# Altium PCB PCB6.PcbDoc
Units mil, origin at the board's own origin, x right, y up, seen from the top; angles counter-clockwise.
Board outline 1980.76 x 1398.48 mil, 2 copper layers (Top Layer, Bottom Layer); 39 components, 19 nets, 73 pads, 17 vias.
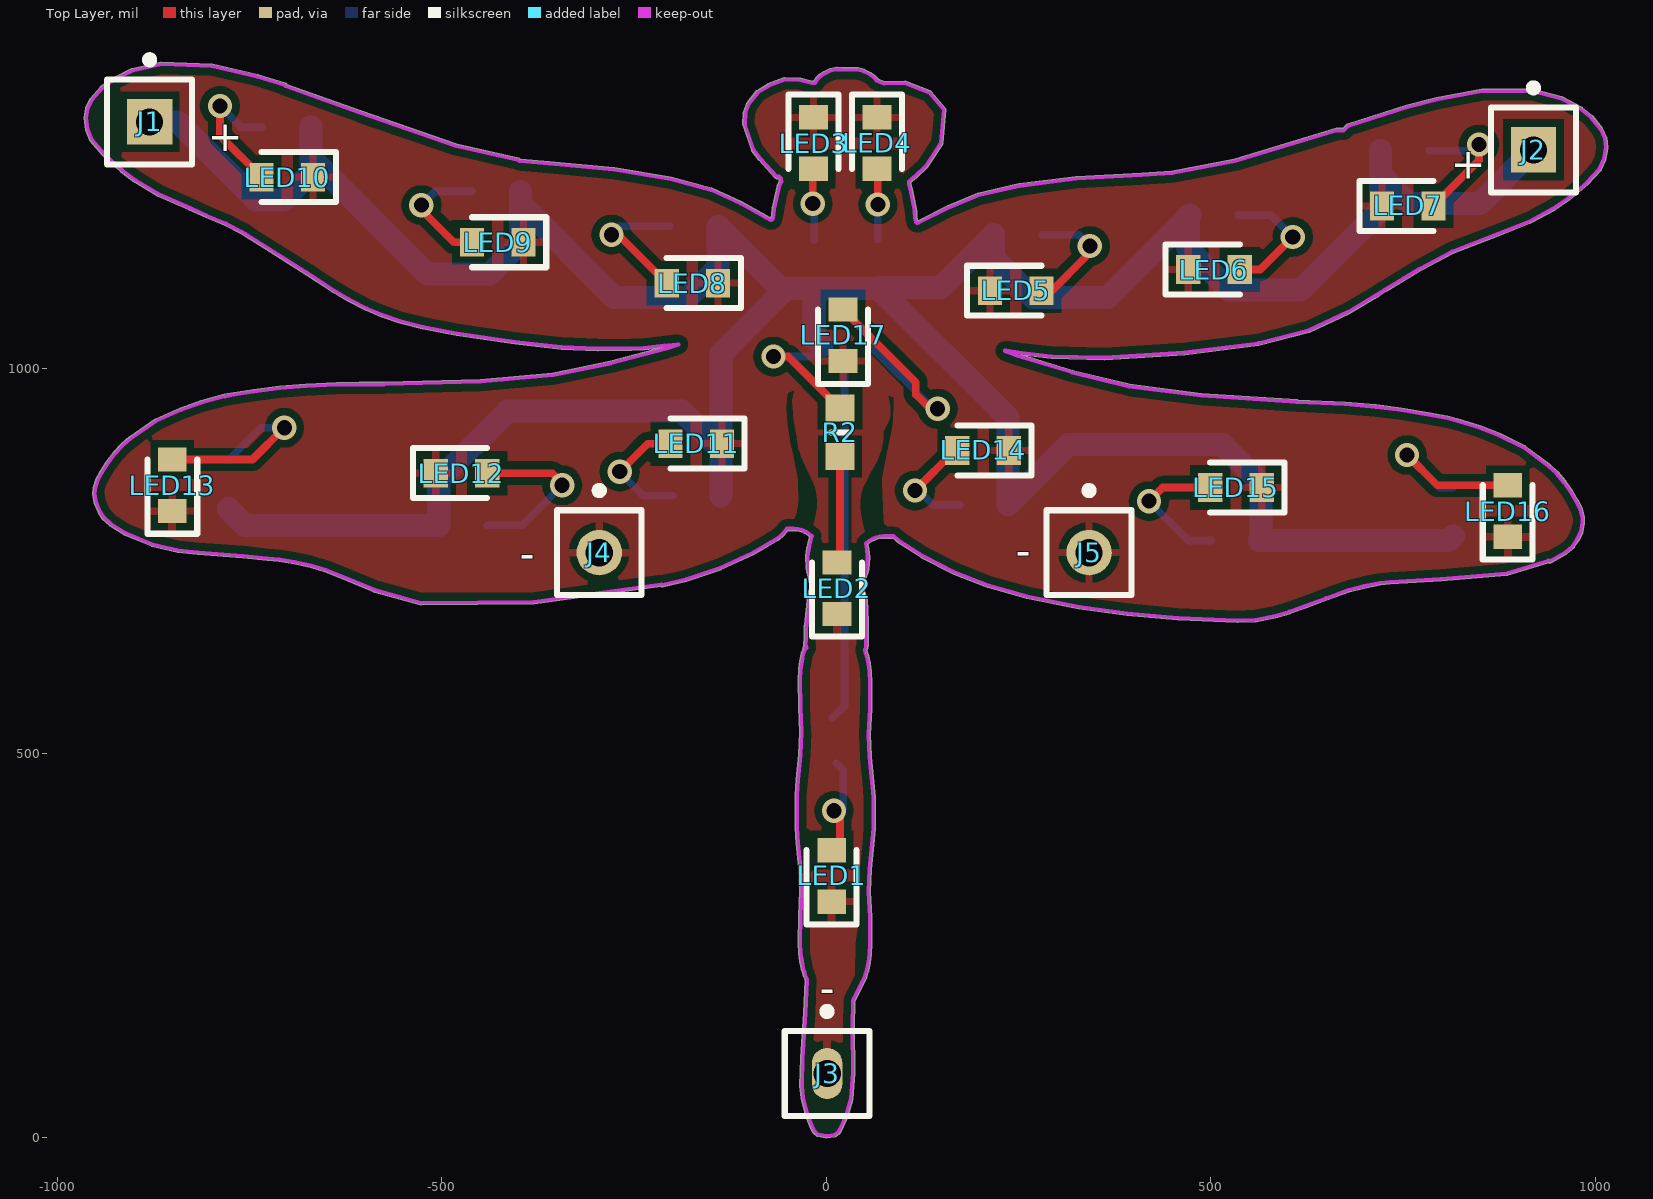
[diagram p0: Top Layer view]
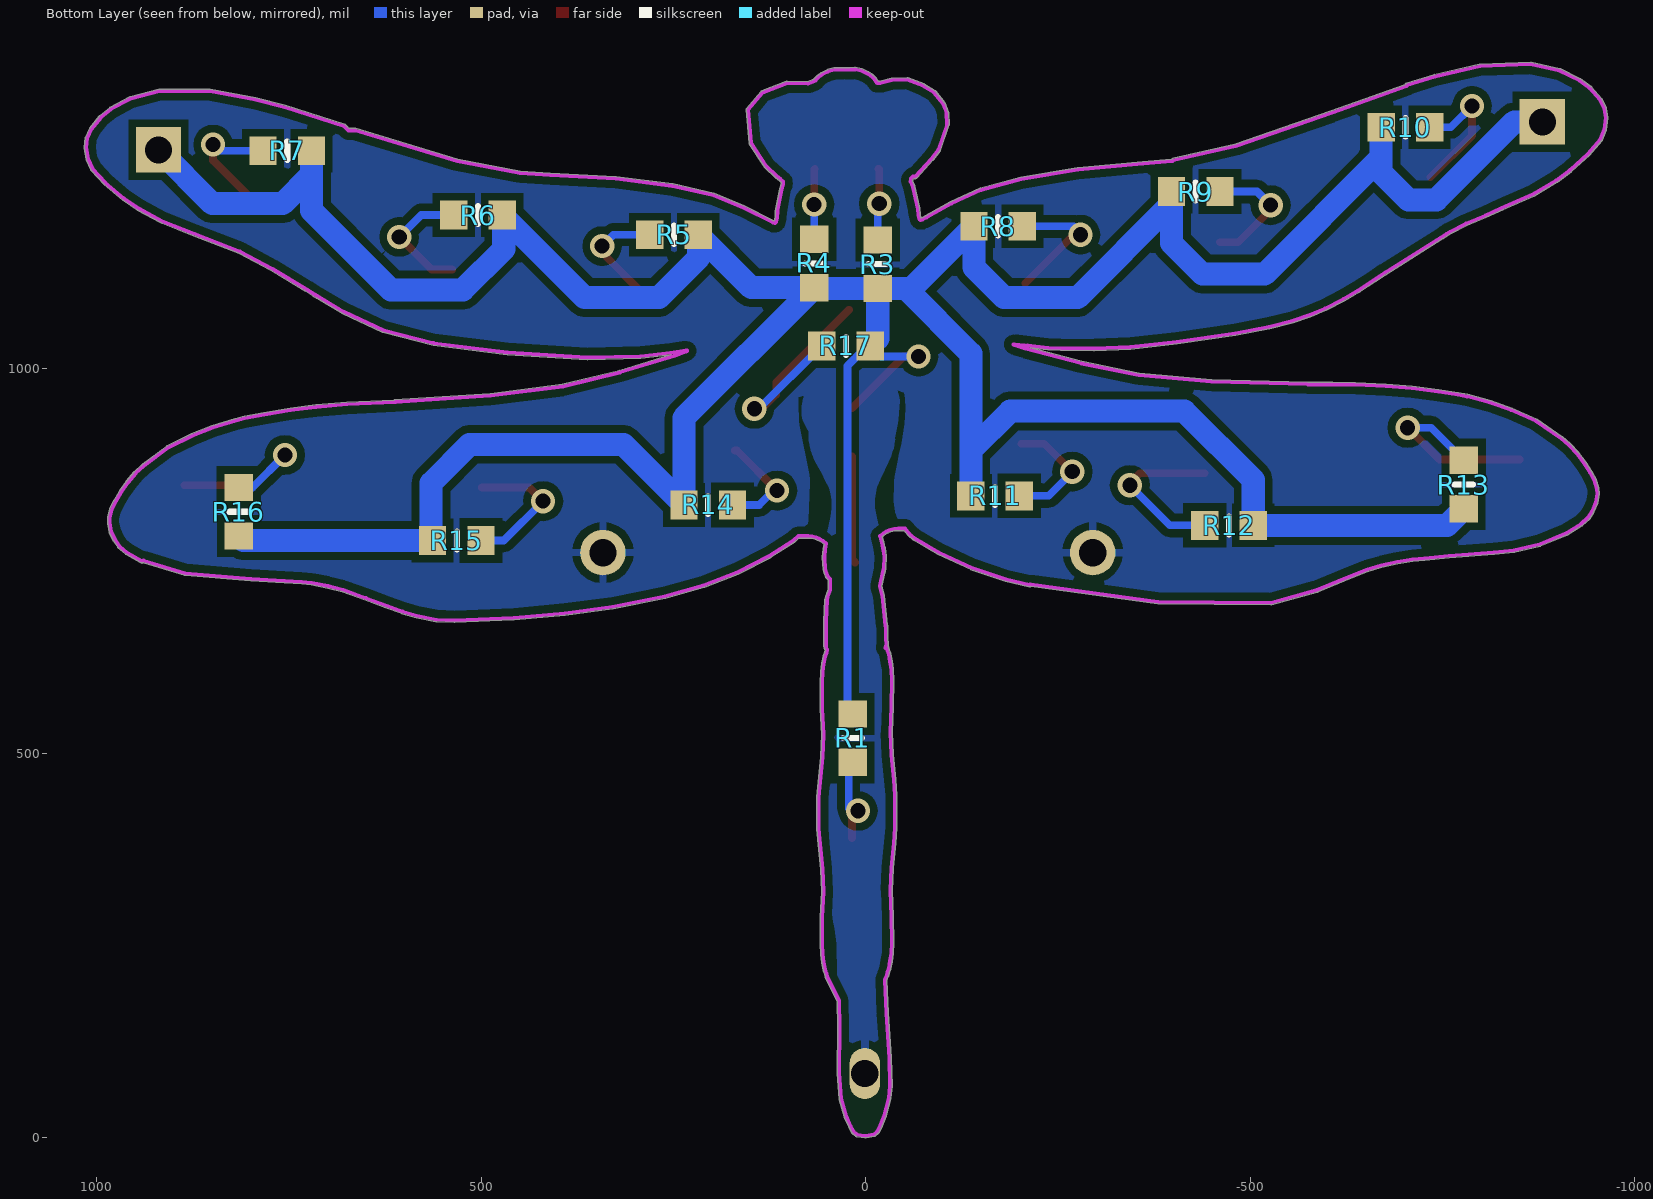
[diagram p1: Bottom Layer view, seen from below]
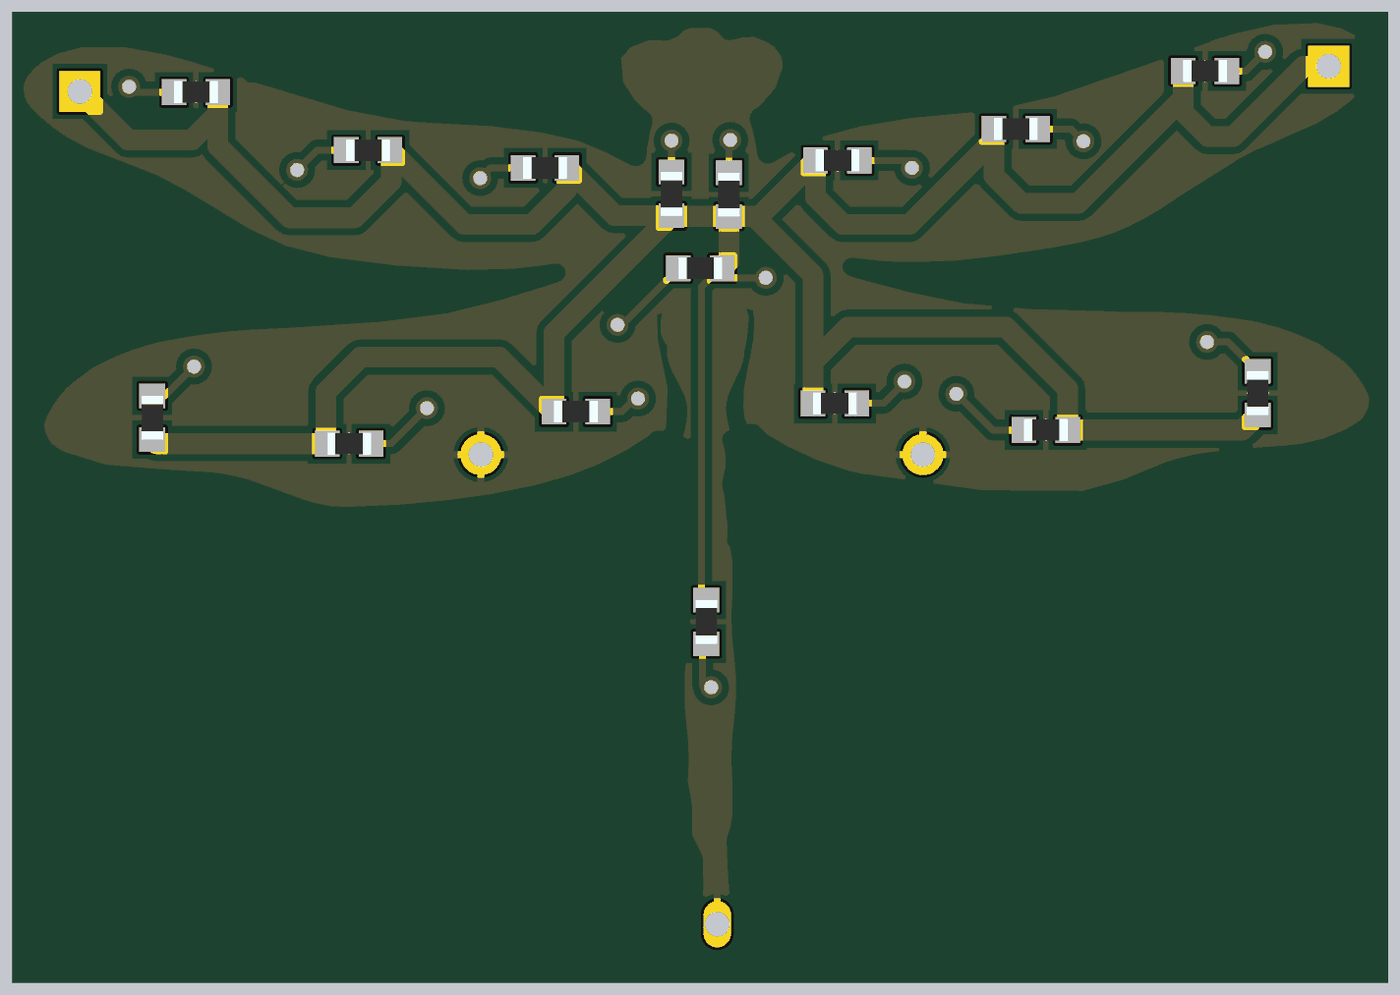
[diagram p2: 3D render of the assembled board from below, using the file's embedded part models]

## Layer stack, top to bottom
Top Solder: solder mask 0.4, Solder Resist, Dk 3.5
Top Layer: signal copper 1.4
Dielectric 1: core 12.6, FR-4, Dk 4.2
Bottom Layer: signal copper 1.4
Solder Side: solder mask 0.4, Solder Resist, Dk 3.5

## Board outline
1026 vertices, not listed, extent -964.87,-0.06 1015.89,1398.42

## Design rules (kind name [scope] priority, off if disabled: settings)
Clearance [All] p1: gap=10
PolygonConnect [All] p1: connectstyle=Relief reliefconductorwidth=10 reliefentries=4 polygonreliefangle="90 Angle" airgapwidth=10
RoutingVias [All] p1: holewidth=19.68 width=31.5 viastyle="Through Hole" minholewidth=15.75 minwidth=27.56 maxholewidth=28 maxwidth=50
SolderMaskExpansion [All] p1: expansion=4
Width [All] p1: maxlimit=30 minlimit=10 preferedwidth=20
30 further rules are at their usual default settings.

## Classes and differential pairs
component class Sheet6: J3

## Components (designator, comment, footprint, x,y, rotation, side; value= is the part's Value field where it differs from the comment)
J1 "Socket" PIN1#1 -879.92,1320.87 r0 top
J2 "Socket" PIN1#1 919.29,1284.45 r0 top
J3 "Socket" PIN1#2 0.98,83.66 r0 top
J4 "Socket" PIN1#3 -295.28,760.83 r0 top
J5 "Socket" PIN1#3 341.54,760.83 r0 top
LED1 "LTST-C191TBKT-5A" LEDC1608X60N 6.89,340.55 r90 top
LED2 "LTST-C191TBKT-5A" LEDC1608X60N 13.78,714.57 r90 top
LED3 "LTST-C191TBKT-5A" LEDC1608X60N -16.73,1293.31 r270 top
LED4 "LTST-C191TBKT-5A" LEDC1608X60N 65.94,1293.31 r270 top
LED5 "LTST-C191TBKT-5A" LEDC1608X60N 246.06,1101.38 r0 top
LED6 "LTST-C191TBKT-5A" LEDC1608X60N 503.94,1128.94 r0 top
LED7 "LTST-C191TBKT-5A" LEDC1608X60N 755.91,1211.61 r0 top
LED8 "LTST-C191TBKT-5A" LEDC1608X60N -174.21,1111.22 r180 top
LED9 "LTST-C191TBKT-5A" LEDC1608X60N -427.17,1164.37 r180 top
LED10 "LTST-C191TBKT-5A" LEDC1608X60N -700.79,1249.02 r180 top
LED11 "LTST-C191TBKT-5A" LEDC1608X60N -169.29,902.56 r180 top
LED12 "LTST-C191TBKT-5A" LEDC1608X60N -474.41,864.17 r0 top
LED13 "LTST-C191TBKT-5A" LEDC1608X60N -850.39,848.43 r90 top
LED14 "LTST-C191TBKT-5A" LEDC1608X60N 203.74,893.7 r180 top
LED15 "LTST-C191TBKT-5A" LEDC1608X60N 532.48,845.47 r180 top
LED16 "LTST-C191TBKT-5A" LEDC1608X60N 885.83,814.96 r90 top
LED17 "LTST-C191TBKT-5A" LEDC1608X60N 21.65,1043.31 r90 top
R1 "KTR03EZPF1501" RESC1608X55N 16.73,519.69 r90 bottom
R2 "KTR03EZPF1501" RESC1608X55N 17.72,917.32 r90 top
R3 "KTR03EZPF1501" RESC1608X55N -15.75,1135.83 r270 bottom
R4 "KTR03EZPF1501" RESC1608X55N 66.93,1136.81 r270 bottom
R5 "KTR03EZPF1501" RESC1608X55N 249.02,1174.21 r180 bottom
R6 "KTR03EZPF1501" RESC1608X55N 503.94,1199.8 r180 bottom
R7 "KTR03EZPF1501" RESC1608X55N 751.97,1283.46 r180 bottom
R8 "KTR03EZPF1501" RESC1608X55N -172.24,1185.04 r0 bottom
R9 "KTR03EZPF1501" RESC1608X55N -429.13,1230.31 r0 bottom
R10 "KTR03EZPF1501" RESC1608X55N -701.77,1313.98 r0 bottom
R11 "KTR03EZPF1501" RESC1608X55N -168.31,834.65 r0 bottom
R12 "KTR03EZPF1501" RESC1608X55N -472.44,796.26 r180 bottom
R13 "KTR03EZPF1501" RESC1608X55N -777.56,849.41 r270 bottom
R14 "KTR03EZPF1501" RESC1608X55N 204.72,822.83 r0 bottom
R15 "KTR03EZPF1501" RESC1608X55N 531.5,776.57 r0 bottom
R16 "KTR03EZPF1501" RESC1608X55N 814.96,813.98 r270 bottom
R17 "KTR03EZPF1501" RESC1608X55N 25.59,1029.53 r180 bottom

## Footprints (in the part's own frame and the unit in brackets; to place one, negate y for a bottom-side part, rotate by r counter-clockwise, add the part's x,y. Pads: shape width x height; smd on the part's side, far side on the other; paste and mask are expansions set on the pad)
LEDC1608X60N [mm]
  rect 0.8x0.95 smd: 1(-0.85,0) 2(0.85,0)
  silkscreen extent -1.6,-0.82 0.85,0.82
PIN1#1 [mm] "Connector; Plug"
  rect 1.5x1.5 hole 0.9: 1(0,0)
  silkscreen extent -1.4,-1.4 1.4,2.17
PIN1#2 [mm] "Connector; Plug"
  oval 1x1.7 hole 0.9: 1(0,0)
  silkscreen extent -1.4,-1.4 1.4,2.17
PIN1#3 [mm] "Connector; Plug"
  round 1.5 hole 0.9: 1(0,0)
  silkscreen extent -1.4,-1.4 1.4,2.17
RESC1608X55N [mm]
  rect 0.9x0.95 smd: 1(-0.8,0) 2(0.8,0)
  silkscreen extent 0,-0.3 0,0.3, body extent -0.8,-0.4 0.8,0.4, height 0.55

## Part data
LED1 LED2 LED3 LED4 LED5 LED6 LED7 LED8 LED9 LED10 LED11 LED12 LED13 LED14 LED15 LED16 LED17: "LED"
R1 R2 R3 R4 R5 R6 R7 R8 R9 R10 R11 R12 R13 R14 R15 R16 R17: "Resistor 1.5K"

## Via types
v1: diameter 31.5, hole 19.68, Top Layer to Bottom Layer, tented both sides, 17 vias

## Nets (pads, with @x,y where several pads share a name; then routed paths per layer and width w, separated by ;. In a path a pad name is that pad's centre, name@x,y a point inside that pad or via, vN(x,y) a via of type N, cw(c..) or ccw(c..) an arc to the next point about the centre after c; other vN are vias at no path point)
5V: J1.1 J2.1 R1.2 R2.2 R3.2 R4.2 R5.2 R6.2 R7.2 R8.2 R9.2 R10.2 R11.2 R12.2 R13.2 R14.2 R15.2 R16.2 R17.2 | length 5473.8
  Top Layer w10: v1(-68.9,1015.75) -49.21,1015.75 R2.2
  Bottom Layer w10: v1(-68.9,1015.75) -19.69,1015.75 R17.2 -2.41,1029.53 23.68,1003.44 23.68,562.06 R1.2@7.87,546.26
  Bottom Layer w30: J1.1 -843.5,1320.87 -742.13,1219.49 -705.71,1219.49 -670.28,1254.92 -670.28,1274.61 ; R13.2 -755.91,796.26 R12.2 -503.94,855.31 -414.37,944.88 -187.99,944.88 -136.81,893.7 ; R10.2 -670.28,1274.61 ; R9.2 R9.2@-397.64,1214.57 ; R11.2 -136.81,893.7 ; R17.2 -15.75,1039.37 R3.2 ; R6.2 R6.2@470.47,1197.83 ; R7.2 720.47,1251.97 ; R16.2 809.06,776.57 R15.2 564.96,778.54 564.96,851.38 514.76,901.57 314.96,901.57 R14.2 236.22,936.02 R4.2 ; J2.1 849.41,1214.57 757.87,1214.57 720.47,1251.97 ; -670.28,1274.61 -518.7,1123.03 -437.99,1123.03 -397.64,1163.39 R9.2@-397.64,1214.57 ; R9.2@-397.64,1214.57 -275.59,1092.52 -180.12,1092.52 -140.75,1131.89 R8.2 -60.04,1104.33 -52.17,1104.33 ; -136.81,893.7 -136.81,1019.69 -52.17,1104.33 ; -52.17,1104.33 R3.2 ; R3.2 65.94,1104.33 R4.2 ; R4.2 148.62,1105.31 R5.2 217.52,1143.7 268.7,1092.52 365.16,1092.52 R6.2@470.47,1197.83 ; R6.2@470.47,1197.83 470.47,1155.51 523.62,1102.36 617.13,1102.36 720.47,1205.71 720.47,1251.97
GND: J3.1 J4.1 J5.1 LED1.1 LED2.1 LED3.1 LED4.1 LED5.1 LED6.1 LED7.1 LED8.1 LED9.1 LED10.1 LED11.1 LED12.1 LED13.1 LED14.1 LED15.1 LED16.1 LED17.1
NetLED1_2: LED1.2 R1.1 | length 123.4
  Top Layer w10: v1(9.84,425.2) 16.49,425.2 v1@17.72,423.97 ; LED1.2@17.72,389.76 v1@17.72,417.91
  Bottom Layer w10: v1(9.84,425.2) v1@15.12,425.2 ; R1.1@12.8,487.2 22.03,477.97 22.03,428.46 v1@21.66,428.09 ; v1@15.12,425.2 18.47,425.2 v1@19.54,426.27 ; v1@15.12,425.2 v1@18.01,428.09 ; v1@18.01,428.09 v1@21.66,428.09 ; v1@18.01,428.09 v1@19.83,426.27 ; v1@19.54,426.27 v1@19.83,426.27 ; v1@19.54,426.27 19.69,426.12 v1@19.83,426.27 ; v1@19.83,426.27 v1@21.66,428.09
NetLED2_2: LED2.2 R2.1 | length 139.4
  Top Layer w10: LED2.2 17.72,751.97 R2.1
NetLED3_2: LED3.2 R3.1 | length 93.7
  Top Layer w10: v1(-17.72,1214.57) -17.72,1258.86 LED3.2
  Bottom Layer w10: v1(-17.72,1214.57) -15.75,1212.6 R3.1
NetLED4_2: LED4.2 R4.1 | length 91.9
  Top Layer w10: LED4.2 66.93,1258.86 v1(66.93,1213.58)
  Bottom Layer w10: R4.1 v1(66.93,1213.58)
NetLED5_2: LED5.2 R5.1 | length 160.4
  Top Layer w10: LED5.2 293.31,1101.38 336.61,1144.69 336.61,1153.54 v1(342.52,1159.45)
  Bottom Layer w10: R5.1 327.76,1174.21 v1(342.52,1159.45)
NetLED6_2: LED6.2 R6.1 | length 169.1
  Top Layer w10: LED6.2 563.98,1128.94 v1(606.3,1171.26)
  Bottom Layer w10: R6.1 577.76,1199.8 v1(606.3,1171.26)
NetLED7_2: LED7.2 R7.1 | length 178.4
  Top Layer w10: LED7.2 848.43,1270.67 v1(848.43,1291.34)
  Bottom Layer w10: R7.1 849.41,1283.46 848.43,1284.45 v1(848.43,1291.34)
NetLED8_2: LED8.2 R8.1 | length 179.4
  Top Layer w10: v1(-279.53,1174.21) -270.67,1174.21 LED8.2
  Bottom Layer w10: v1(-279.53,1174.21) -279.53,1176.18 -270.67,1185.04 R8.1
NetLED9_2: LED9.2 R9.1 | length 171
  Top Layer w10: v1(-526.57,1212.6) -532.48,1212.6 -484.25,1164.37 LED9.2
  Bottom Layer w10: v1(-526.57,1212.6) -508.86,1230.31 R9.1
NetLED10_2: LED10.2 R10.1 | length 181.6
  Top Layer w10: v1(-788.42,1341.6) -788.42,1303.19 LED10.2
  Bottom Layer w10: v1(-788.42,1341.6) -760.83,1313.98 R10.1
NetLED11_2: LED11.2 R11.1 | length 163.5
  Top Layer w10: v1(-268.7,866.14) -232.28,902.56 LED11.2
  Bottom Layer w10: v1(-268.7,866.14) -268.7,865.16 -238.19,834.65 R11.1
NetLED12_2: LED12.2 R12.1 | length 224.7
  Top Layer w10: LED12.2 -356.3,864.17 -346.46,854.33 -346.46,851.38 v1(-343.5,848.43)
  Bottom Layer w10: R12.1 -395.67,796.26 v1(-343.5,848.43)
NetLED13_2: LED13.2 R13.1 | length 253.2
  Top Layer w10: LED13.2 -746.06,881.89 v1(-704.72,923.23)
  Bottom Layer w10: R13.1 -735.24,923.23 v1(-704.72,923.23)
NetLED14_2: LED14.2 R14.1 | length 148.5
  Top Layer w10: v1(115.16,841.58) 167.29,893.7 LED14.2
  Bottom Layer w10: v1(115.16,841.58) 115.16,845.78 138.11,822.83 R14.1
NetLED15_2: LED15.2 R15.1 | length 189
  Top Layer w10: v1(419.29,827.76) 437.01,845.47 LED15.2
  Bottom Layer w10: v1(419.29,827.76) 470.47,776.57 R15.1
NetLED16_2: LED16.2 R16.1 | length 224.8
  Top Layer w10: v1(754.92,887.8) 794.29,848.43 LED16.2
  Bottom Layer w10: v1(754.92,887.8) 797.24,845.47 R16.1
NetLED17_2: LED17.2 R17.1 | length 307.1
  Top Layer w10: LED17.2 116.14,982.28 116.14,966.54 134.8,947.88 v1(144.69,947.88)
  Bottom Layer w10: R17.1 138.73,947.88 v1(144.69,947.88)

## Polygon pours and split planes (outlines as drawn)
GND on Bottom Layer "GND_L02_P002" (solid, pour order 2): 1201 vertices, not listed, extent -964.87,-0.06 1015.89,1398.42
GND on Top Layer "GND_L01_P003" (solid, pour order 3): 1201 vertices, not listed, extent -964.87,-0.06 1015.89,1398.42

## Keep-outs
Keep-Out Layer:
  lines w5.04: -827.36,1209.07 -805.53,1198.95 -780.72,1188.53 -759.39,1177.62 -754.93,1175.13 -748.94,1170.89 -673.61,1123.73 ; -826.24,1208.58 -867.62,1226.59 -897.81,1244.46 -915.96,1258.12 -939.2,1279.14 -955.2,1297.98 -960.59,1311.23 -962.34,1325.97 -960.44,1338.21 -954.75,1349.69 -941.94,1364.45 -927.89,1374.91 -902.03,1387.54 -864.61,1395.89 -798.66,1393.31 -740.16,1380.01 -703.7,1368.67 -702.97,1367.28 -606.49,1332.79 -480.92,1289.64 -400.24,1271.03 -398.47,1269.79 -360.73,1266.75 -275.93,1258.8 -202.41,1246.54 -150,1232.47 -111.62,1214.82 -78.91,1196.63 -74.08,1193.93 -71.25,1193.17 -69.66,1194.37 -68.43,1200.15 -67.72,1207.63 -61.25,1236.43 -58.55,1243.27 -58.6,1246.47 -61.71,1249.62 -64.81,1249.78 -85.8,1272.94 -94.94,1284.92 -105.93,1317.3 -105.33,1332.75 -100.92,1344.22 -89.13,1359.11 -74.9,1367.81 -54.11,1376.01 -33.92,1375.23 -18.71,1371.46 -15.06,1371.32 -11.39,1376.76 -6.82,1380.9 -2.38,1383.8 5.63,1387.42 13.86,1389.21 20.37,1388.96 27.11,1388.69 33.86,1388.69 40.38,1388.69 48.53,1386.58 56.4,1382.65 60.71,1379.58 65.3,1375.1 65.3,1374.49 75.02,1370.59 102.14,1371.21 133.95,1358.74 152.82,1336.62 148.98,1293.65 128.99,1262.95 115.65,1250.4 110.43,1246.26 107.2,1243.23 107.03,1240.04 109.46,1233.1 114.8,1204.06 115.22,1196.56 116.22,1190.74 117.77,1189.48 120.62,1190.13 ; -675.6,1125.13 -669.85,1121.12 -660.76,1115.02 -640.83,1101.87 -621.31,1090.6 -597.19,1078.11 -577.73,1069.79 -554.93,1062.01 -524.44,1054.27 -480.74,1046 -404.48,1034.73 -344.61,1027.98 -296.8,1026.11 -253.89,1026.38 -237.22,1027.11 -210.26,1030.07 ; -213.84,1029.78 -193.55,1031.85 -192.6,1031.78 -192.36,1031.71 -192.2,1031.59 -192.2,1031.5 -192.26,1031.4 -192.53,1031.18 -193.2,1030.84 -195.94,1029.8 -207.83,1026.15 -280.4,1006.92 -355.1,991.63 -449.7,983.37 -574.61,979.98 -574.98,979.61 -607.37,979.61 -636.62,979.32 -676.61,977.51 -710.1,974.61 -744.58,970.26 -770.03,966.42 -782.01,964.02 -812.47,955.97 -839.02,946.45 -871.16,932.25 -904.03,909.63 -914.48,900.78 -925.36,888.9 -934.33,877.13 -942,865.12 -947.58,854.65 -950.87,844.2 -951.15,837.09 -949.46,826.06 -944.57,814.67 -939.25,806.22 -930.15,797.85 -910.37,785.78 -876.4,771.78 -842.74,763.86 -816.74,761.02 -758.34,756.81 -726.74,753.39 -710.87,751.85 -691.37,748.97 -670.37,744.06 -651.11,738.45 -621.92,726.52 -595.22,715.51 -586.86,712.19 -527.04,695.7 -379.91,696.75 -214.18,719.53 -212.85,718.71 -182.45,725.92 -137.92,741.17 -95.14,760.91 -63.63,779.42 -56.88,785.13 -50.99,792.11 -42.44,792.11 cw(c-42.44,758.76) -18.86,782.34 -21.17,773.91 -22.72,766.96 -24.15,756.25 -23.55,740.65 -22.8,736.41 -22.34,736.1 -18.67,717.08 -21.79,704.8 -25.69,665.55 -26.41,664.83 -26.41,649.94 -26.75,641.3 -25.71,637 ; -27.39,637.65 -28.33,633.85 -30.19,628.81 -31.85,619.14 -33.43,609.1 -33.99,594.67 -33.67,560.82 -32.1,527.37 -33.25,497.91 -36.55,465.86 -38.26,445.3 -38.26,424.45 -38.26,403.6 -36.55,383.04 -33.25,350.99 -32.1,321.53 -33.67,288.08 -33.99,254.23 -33.43,239.8 -31.85,229.76 -30.19,220.09 -28.33,215.05 -27.39,211.25 -25.18,205.44 -26.86,162.27 -31.1,103.96 -31.92,67.59 -30,51.8 -24.33,29.36 -19.21,16.41 -16.6,10.72 -15.61,8.71 -15.32,8.14 ; 50.03,634.69 50.96,630.9 52.83,625.85 54.49,616.18 56.07,606.15 56.63,591.72 56.31,557.87 54.74,524.42 55.89,494.96 59.19,462.9 60.89,442.35 60.9,421.5 ; 50.53,635.51 51.73,639.77 51.73,648.41 51.73,671.63 51.06,685.28 50.35,699.83 49.25,703.9 48.36,706.77 47.04,710.07 46.33,713.29 46.33,726.49 49.33,729.79 51.51,734.96 52.42,739.17 53.63,754.73 52.62,765.49 51.34,772.5 cw(c75.03,748.81) 75.03,782.31 87.47,782.31 93.99,776.34 124.75,756.61 166.72,735.22 210.62,718.24 261.01,704.19 328.87,690.55 391.12,682.09 457.4,675.96 534.66,672.57 558.06,673.61 583.58,678.68 602.03,684.12 622.67,691.71 649.78,701.67 679.42,712.45 698.88,717.3 720.06,721.39 733.07,722.79 755.6,724.09 799.03,726.78 884.54,733.73 938.69,750.44 940.76,749.86 960.57,760.91 969.98,768.91 975.63,777.15 980.97,788.34 983.08,799.3 983.08,806.41 980.2,816.99 975.03,827.67 967.84,839.96 959.33,852.07 948.93,864.37 938.83,873.62 906.87,897.51 875.31,912.95 849.15,923.51 819.03,932.74 807.16,935.6 781.87,940.43 747.59,946.13 714.23,950.33 674.34,953.71 611.28,956.78 612.41,956.78 487.73,965.05 393.53,977 319.48,995.2 247.71,1017.25 235.98,1021.36 233.28,1022.5 232.63,1022.87 232.36,1023.11 232.3,1023.21 232.31,1023.3 232.47,1023.41 232.72,1023.47 233.66,1023.5 253.86,1020.64 292.52,1016.16 361.45,1014.37 465.42,1020.89 561.67,1033.15 626.82,1049.81 678.41,1073.76 716.95,1096.56 ; 60.94,423.01 60.94,402.16 59.23,381.6 55.93,349.55 54.78,320.09 56.36,286.64 56.67,252.78 56.11,238.36 54.53,228.32 52.88,218.65 51.01,213.61 50.07,209.81 34.45,178.15 33.92,143.93 34.52,84.43 31.96,50.59 25.41,28.38 19.8,15.65 16.96,10.06 15.9,8.09 15.59,7.53 15.53,7.43 ; 120.61,1190.14 158.95,1209.53 197.99,1225.67 250.91,1237.68 324.85,1247.06 409.9,1251.7 449.54,1254.43 530.89,1269.87 664.1,1309.9 672.56,1309.9 676.2,1313.53 678.01,1315.35 755.47,1339.84 793.46,1350.04 852.43,1361.05 918.44,1361.05 955.5,1351.24 980.85,1337.61 994.48,1326.61 1006.7,1311.37 1011.94,1299.67 1013.36,1287.37 1011.03,1272.71 1005.13,1259.67 988.41,1241.47 964.37,1221.38 945.7,1208.44 914.83,1191.76 872.77,1175.38 813.46,1152.24 771.6,1129.93 727.07,1103.06 713.09,1094.1 ; -15.33,8.14 -11.05,4.49 0.03,2.48 11.17,4.06 15.59,7.54 15.53,7.44 15.53,7.43 ; -15.32,8.14 -15.27,8.03 ; -15.33,8.14 -15.27,8.04 -15.27,8.03 ; -15.27,8.03 -15.27,8.03 ; 15.53,7.43 15.53,7.43 ; -586.91,712.07 ccw(c-586.86,712.19) -586.91,712.06

## Silkscreen, mask and mechanical layers (free items; w line width, h text height)
Top Overlay:
  text "+" at -804.13,1282.48 h40
  text "+" at 812.01,1247.05 h40
  text "-" at 246.06,744.09 h40
  text "-" at -398.62,740.16 h40
  text "-" at -8.86,175.2 h40
Mechanical 4:
  drawing of 452 lines, arcs and shapes, not listed

## Dimensions
-962.34,1325.97 to 1011.94,1299.67 on Drill Drawing
0.05,2.53 to 27.12,1387.83 on Drill Drawing